# Altium PCB temperature.PcbDoc (part 1 of 3)
Units mil, origin at the board's own origin, x right, y up, seen from the top; angles counter-clockwise.
Board outline 6000 x 4000 mil, 2 copper layers (Top Layer, Bottom Layer); 10 components, 17 nets, 62 pads, 0 vias.
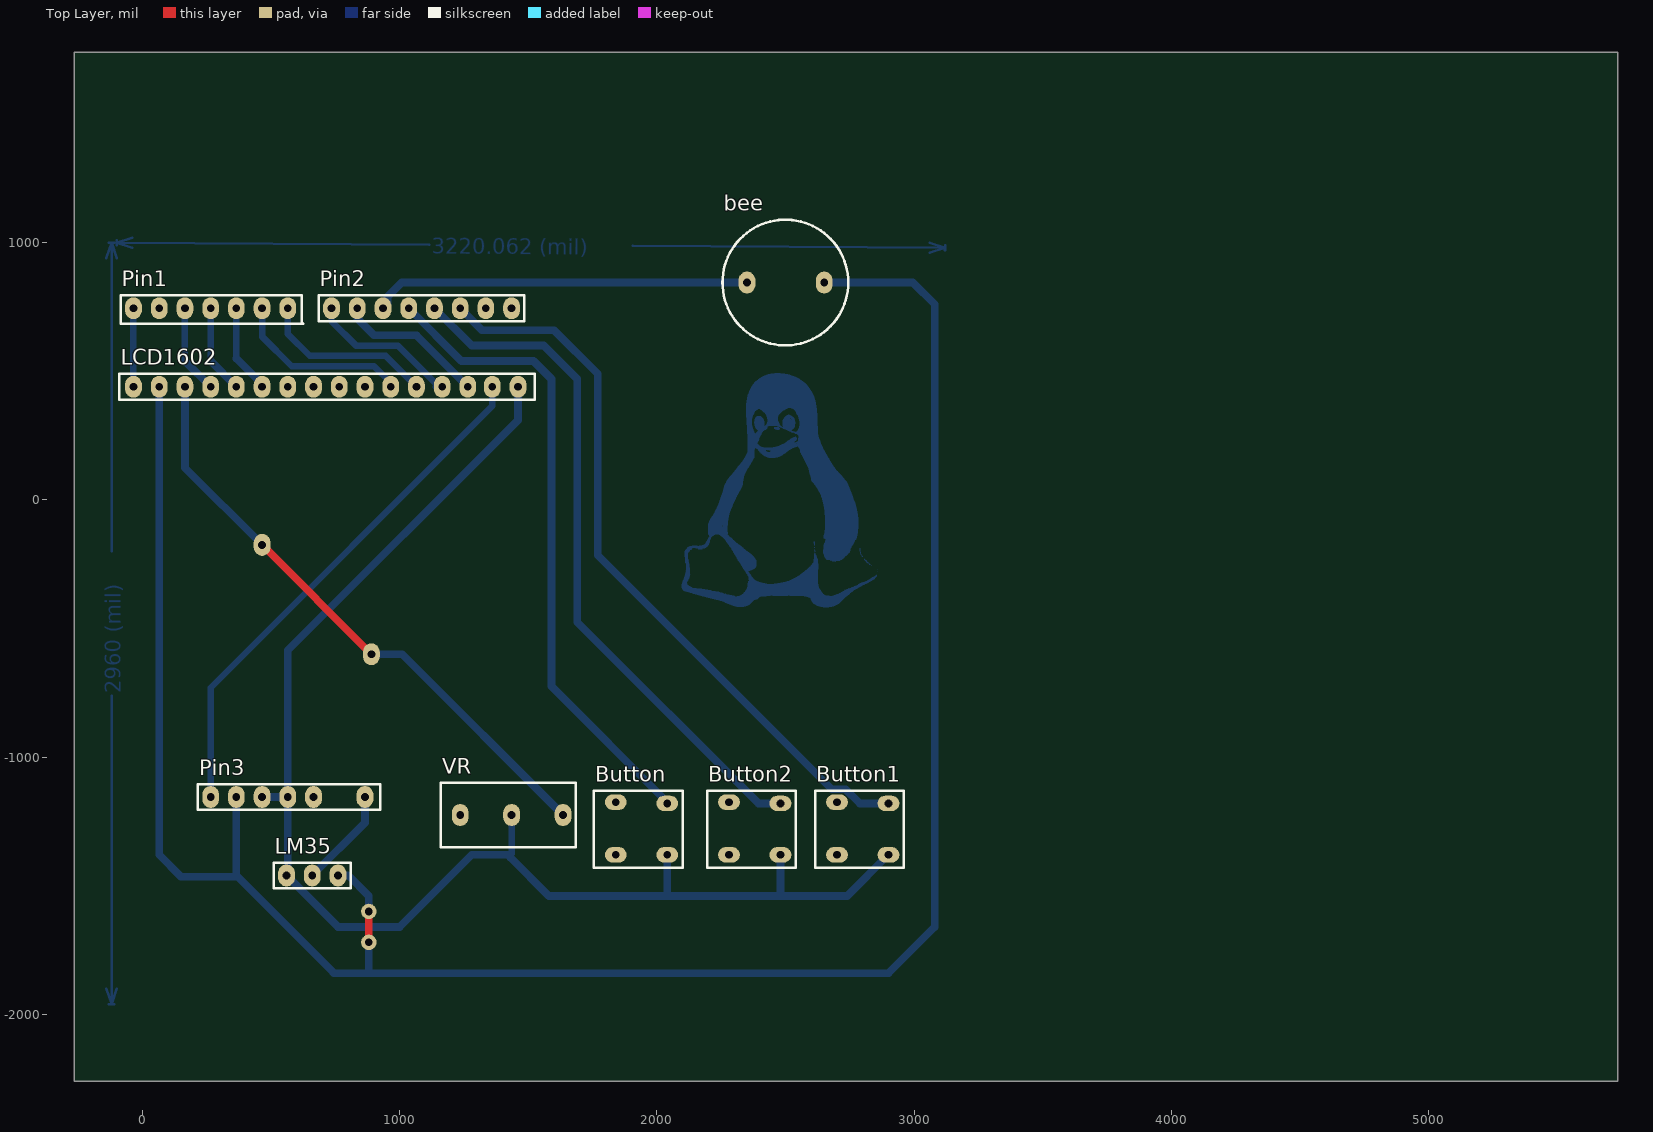
[diagram p0: Top Layer view]
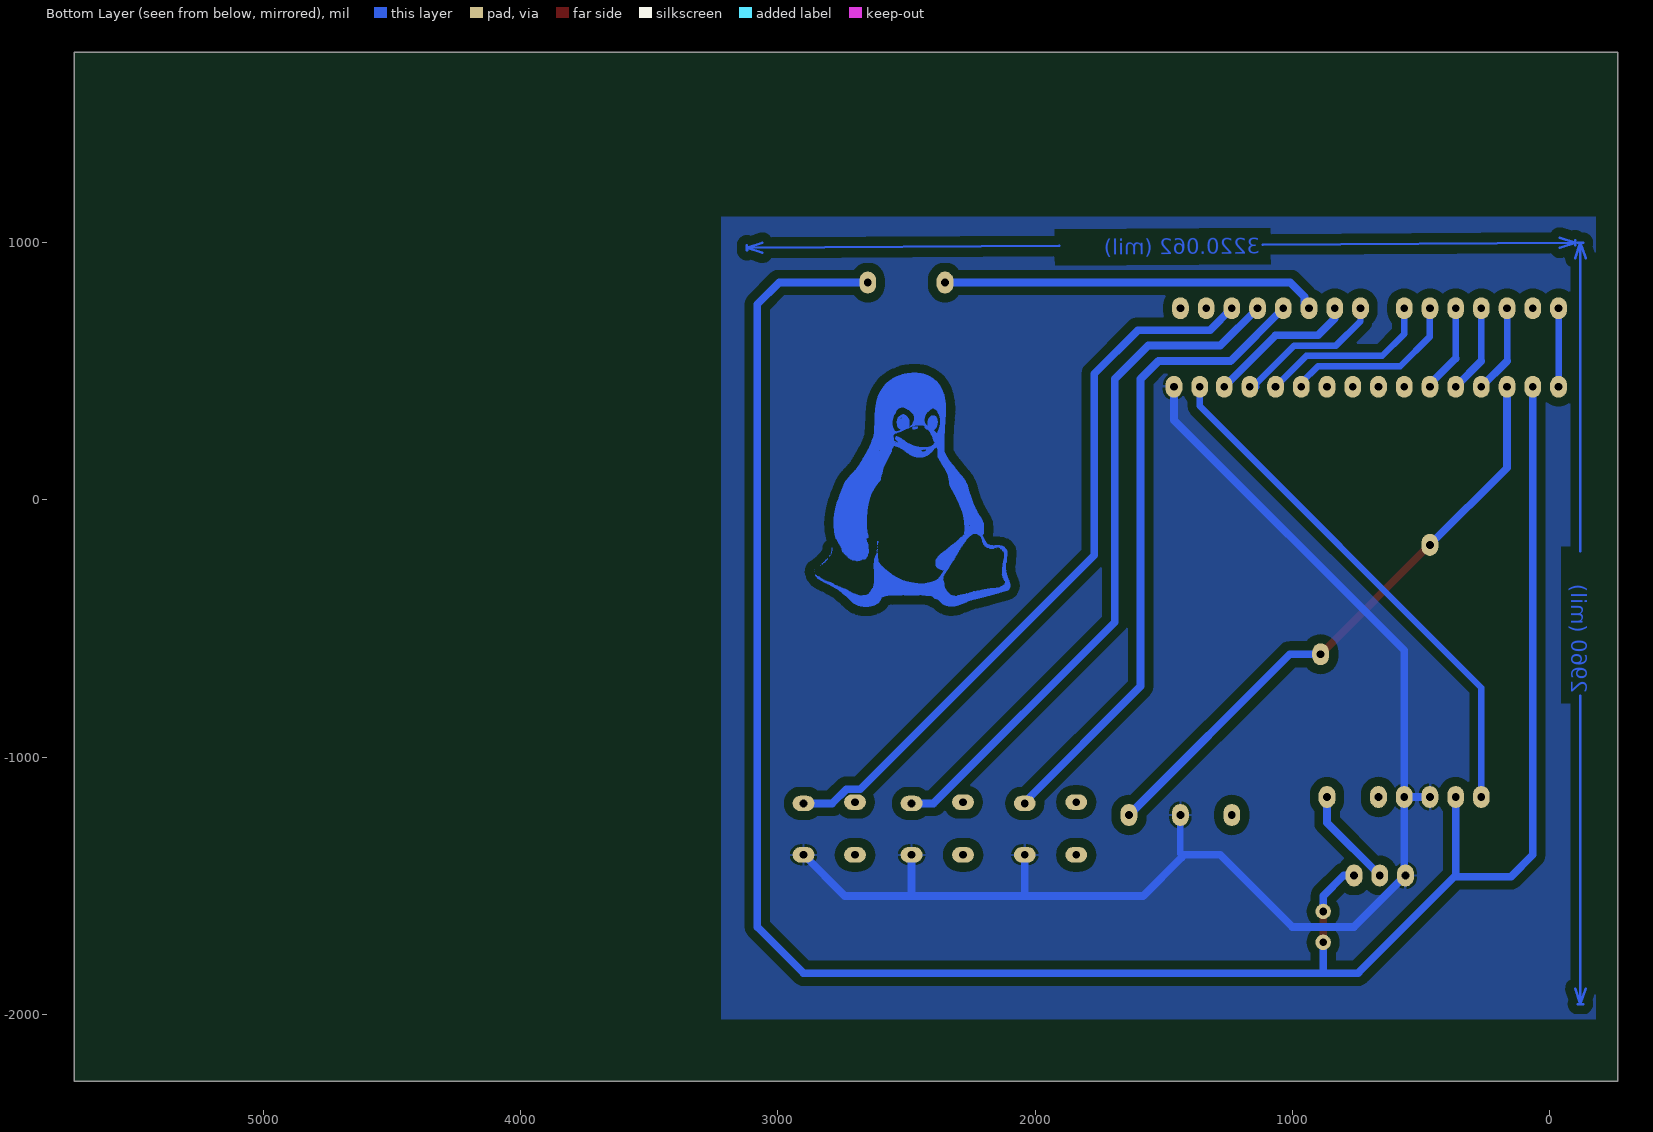
[diagram p1: Bottom Layer view, seen from below]

## Layer stack, top to bottom
Top Layer: signal copper 1.4
Dielectric: dielectric 12.6, FR-4, Dk 4.8
Bottom Layer: signal copper 1.4

## Board outline
-265,-2260 5735,-2260 5735,1740 -265,1740

## Design rules (kind name [scope] priority, off if disabled: settings)
Clearance [All] p1: gap=35
PolygonConnect [All] p1: connectstyle=Relief reliefconductorwidth=10 reliefentries=4 polygonreliefangle="90 Angle" airgapwidth=10
RoutingVias [All] p1: holewidth=28 width=50 viastyle="Through Hole" minholewidth=28 minwidth=50 maxholewidth=28 maxwidth=50
SolderMaskExpansion [All] p1: expansion=4
Width [All] p1: maxlimit=35 minlimit=25 preferedwidth=30
28 further rules are at their usual default settings.

## Components (designator, comment, footprint, x,y, rotation, side; value= is the part's Value field where it differs from the comment)
bee "bee" bee -40775,-10580 r180 top
Button "Button" button 13215,-40430 r270 top
Button1 "Button" button 14075,-40430 r270 top
Button2 "Button" button 13655,-40430 r270 top
LCD1602 "LCD1602" LCD1602 -1205,695 r0 top
LM35 "LM35" LM35 22960,-43060 r180 top
Pin1 "Pin1" Pin1 -35,745 r0 top
Pin2 "Pin2" Pin2 42235,13695 r0 top
Pin3 "Pin3" Pin3 265,-1155 r0 top
VR "VR" VR -29415,-14225 r180 top

## Footprints (in the part's own frame and the unit in brackets; to place one, negate y for a bottom-side part, rotate by r counter-clockwise, add the part's x,y. Pads: shape width x height; smd on the part's side, far side on the other; paste and mask are expansions set on the pad)
bee [mil]
  oval 65x85 hole 30: 1(-43425,-11425) 2(-43125,-11425)
  silkscreen extent -43519,-11669 -43030,-11181
button [mil]
  oval 60x85 hole 30: 1(-39250,-11175) 2(-39050,-11175) 3(-39255,-11375) 4(-39050,-11375)
  silkscreen extent -39300,-11460 -39000,-11115
LCD1602 [mil]
  oval 65x85 hole 30: 1(1170,-255) 2(1270,-255) 3(1370,-255) 4(1470,-255) 5(1570,-255) 6(1670,-255) 7(1770,-255) 8(1870,-255) 9(1970,-255) 10(2070,-255) 11(2170,-255) 12(2270,-255) 13(2370,-255) 14(2470,-255) 15(2565,-255) 16(2665,-255)
  silkscreen extent 1115,-305 2730,-205
LM35 [mil]
  oval 65x85 hole 30: 1(22200,-41600) 2(22300,-41600) 3(22400,-41600)
  silkscreen extent 22150,-41650 22450,-41550
Pin1 [mil]
  oval 65x85 hole 30: 1(0,0) 2(100,0) 3(200,0) 4(300,0) 5(400,0) 6(500,0) 7(600,0)
  silkscreen extent -50,-60 660,50
Pin2 [mil]
  oval 65x85 hole 30: 1(-41500,-12950) 2(-41400,-12950) 3(-41300,-12950) 4(-41200,-12950) 5(-41100,-12950) 6(-41000,-12950) 7(-40900,-12950) 8(-40800,-12950)
  silkscreen extent -41550,-13000 -40750,-12900
Pin3 [mil]
  oval 65x85 hole 30: 1(0,0) 2(100,0) 3(200,0) 4(300,0) 5(400,0) 6(600,0)
  silkscreen extent -50,-50 660,50
VR [mil]
  oval 65x85 hole 30: 1(-31050,-13000) 2(-30850,-13000) 3(-30650,-13000)
  silkscreen extent -31100,-13125 -30575,-12875

## Free pads (board coordinates)
  round 60 hole 30: 0(880,-1600) 1(880,-1720)
  oval 65x85 hole 30: 52(465,-175) 53(890,-600)
  oval 60x85 hole 30: 61(465,745)

## Nets (pads, with @x,y where several pads share a name; then routed paths per layer and width w, separated by ;. In a path a pad name is that pad's centre, name@x,y a point inside that pad or via, vN(x,y) a via of type N, cw(c..) or ccw(c..) an arc to the next point about the centre after c; other vN are vias at no path point)
L1: bee.1 LCD1602.2 LM35.1 pad.0 pad.1 Pin3.2 | length 8737
  Top Layer w30: pad.1@880,-1720 pad.0@880,-1600
  Bottom Layer w30: LCD1602.2@65,440 65,-1380 150,-1465 360,-1465 ; Pin3.2@365,-1155 365,-1460 740,-1835 ; 742.5,-1837.5 745,-1840 880,-1840 ; LM35.1@760,-1460 800,-1460 880,-1540 pad.0@880,-1600 ; pad.1@880,-1720 880,-1840 ; bee.1@2650,845 2995,845 3080,760 3080,-1660 2900,-1840 880,-1840
Netbee_2: bee.2 Pin2.3 | length 1472
  Bottom Layer w30: Pin2.3@935,745 952.5,762.5 952.5,789.17 1008.33,845 bee.2@2350,845
NetButton1_1: Button1.1 Pin2.6 | length 2875.3
  Bottom Layer w30: Pin2.6@1235,745 1320,660 1600,660 1770,490 1770,-215 2680,-1125 2733.21,-1125 2788.21,-1180 Button1.1@2900,-1180
NetButton1_2: Button1.2 Button2.2 Button.2 LCD1602.16 LM35.3 Pin3.3 Pin3.4 VR.2 | length 5512.9
  Bottom Layer w25: 1435,-1375 VR.2@1435,-1225
  Bottom Layer w30: Pin3.3@465,-1155 Pin3.4@565,-1155 ; LM35.3@560,-1460 760,-1660 1000,-1660 1280,-1380 1430,-1380 1430,-1390 1580,-1540 2040,-1540 ; LM35.3@565,-1455 Pin3.4@565,-1155 ; LCD1602.16@1460,440 1460,310 565,-585 Pin3.4@565,-1155 ; Button.2@2040,-1380 2040,-1540 ; Button2.2@2480,-1380 2480,-1540 ; Button1.2@2900,-1380 2740,-1540 2480,-1540 ; 2040,-1540 2480,-1540
NetButton2_1: Button2.1 Pin2.5 | length 2695.9
  Bottom Layer w30: Pin2.5@1135,745 1280,600 1560,600 1690,470 1690,-475 2395,-1180 Button2.1@2480,-1180
NetButton_1: Button.1 Pin2.4 | length 2500.3
  Bottom Layer w30: Pin2.4@1035,745 1240,540 1520,540 1590,470 1590,-725 Button.1@2040,-1175
NetLCD1602_1: LCD1602.1 Pin1.1 | length 305
  Bottom Layer w25: LCD1602.1@-35,440 Pin1.1@-35,745
NetLCD1602_3: LCD1602.3 pad.52 pad.53 VR.1 | length 2344.2
  Top Layer w30: pad.52@465,-175 pad.53@890,-600
  Bottom Layer w30: LCD1602.3@165,440 165,125 pad.52@465,-175 ; pad.53@890,-600 1010,-600 VR.1@1635,-1225
NetLCD1602_4: LCD1602.4 Pin1.3 | length 346.4
  Bottom Layer w25: 165,540 Pin1.3@165,745
  Bottom Layer w30: 165,540 LCD1602.4@265,440
NetLCD1602_5: LCD1602.5 Pin1.4 | length 346.4
  Bottom Layer w25: 265,540 Pin1.4@265,745
  Bottom Layer w30: 265,540 LCD1602.5@365,440
NetLCD1602_6: LCD1602.6 Pin1.5 | length 336.4
  Bottom Layer w25: 365,550 Pin1.5@365,745
  Bottom Layer w30: 365,550 LCD1602.6@465,450
NetLCD1602_11: LCD1602.11 pad.61 Pin1.6 | length 699.6
  Bottom Layer w10: LCD1602.11@965,440 LCD1602.11@965,455
  Bottom Layer w25: Pin1.6@465,745 465,635 580,520 900,520 LCD1602.11@965,455
NetLCD1602_12: LCD1602.12 Pin1.7 | length 684.9
  Bottom Layer w25: Pin1.7@565,745 565,645 650,560 945,560 LCD1602.12@1065,440
NetLCD1602_13: LCD1602.13 Pin2.1 | length 595.6
  Bottom Layer w25: Pin2.1@735,745 735,695 830,600 992.78,600 1152.78,440 LCD1602.13@1165,440
  Bottom Layer w30: LCD1602.13@1142.78,440 LCD1602.13@1152.78,440
NetLCD1602_14: LCD1602.14 Pin2.2 | length 579.8
  Bottom Layer w30: Pin2.2@835,745 835,705 900,640 1065,640 LCD1602.14@1265,440
NetLCD1602_15: LCD1602.15 Pin3.1 | length 2048.6
  Bottom Layer w25: Pin3.1@265,-1155 265,-730 1360,365 LCD1602.15@1360,440
NetLM35_2: LM35.2 Pin3.6 | length 389.9
  Bottom Layer w30: LM35.2@660,-1460 865,-1255 Pin3.6@865,-1155
pads on no net: Button1.3 Button1.4 Button2.3 Button2.4 Button.3 Button.4 LCD1602.7 LCD1602.8 LCD1602.9 LCD1602.10 Pin1.2 Pin2.7 Pin2.8 Pin3.5 VR.3
copper on no net: | length 176094.4